# Altium PCB PCB2.PcbDoc
Units mm, origin at the board's own origin, x right, y up, seen from the top; angles counter-clockwise.
Board outline 70 x 70 mm, 2 copper layers (Top Layer, Bottom Layer); 45 components, 52 nets, 141 pads, 143 vias.
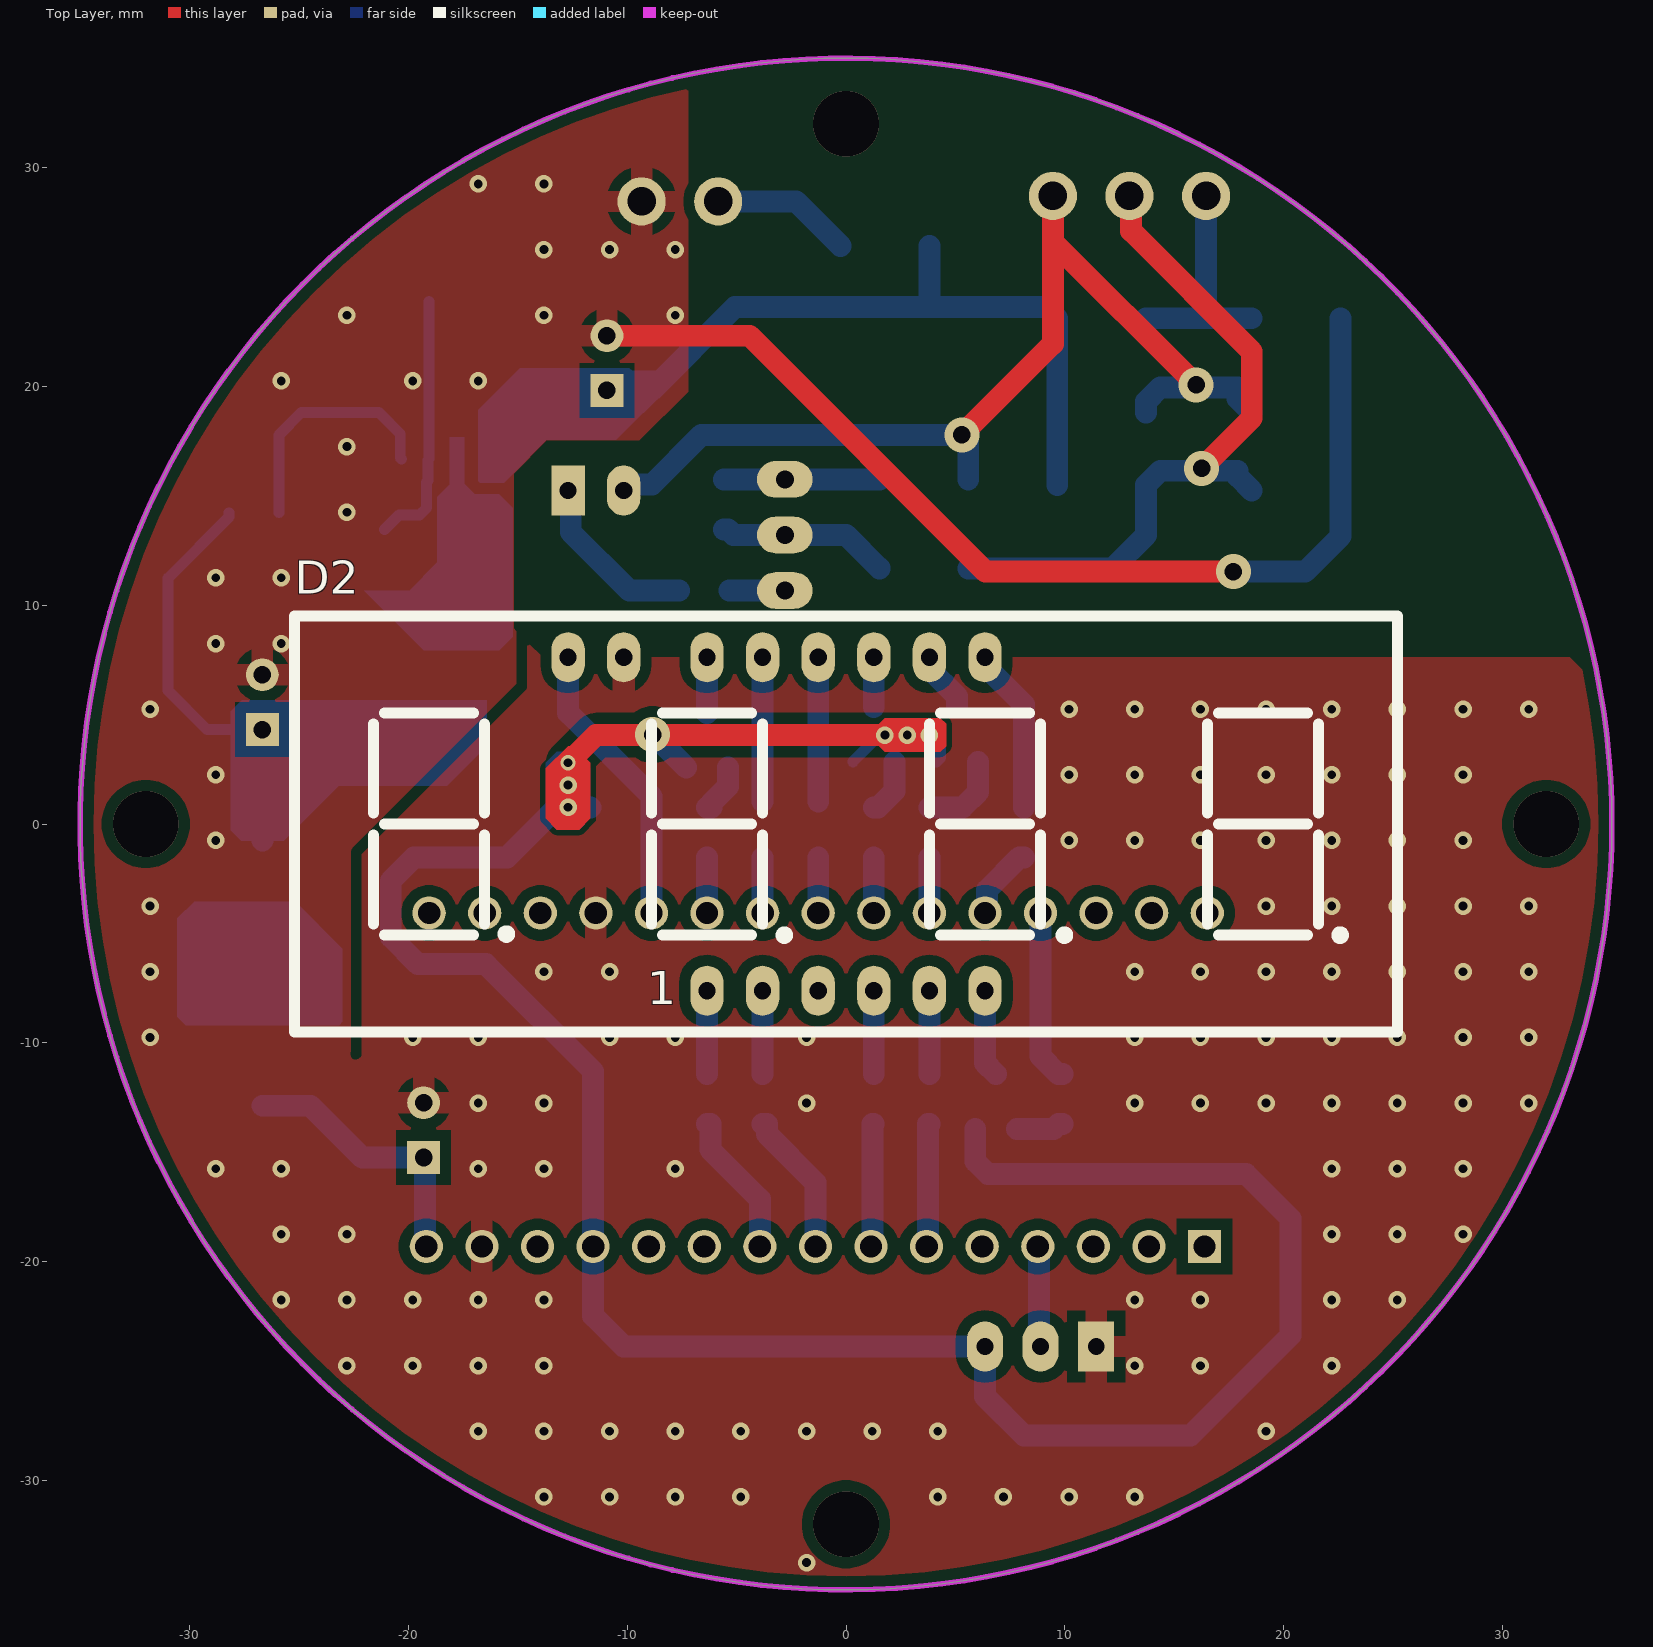
[diagram p0: Top Layer view]
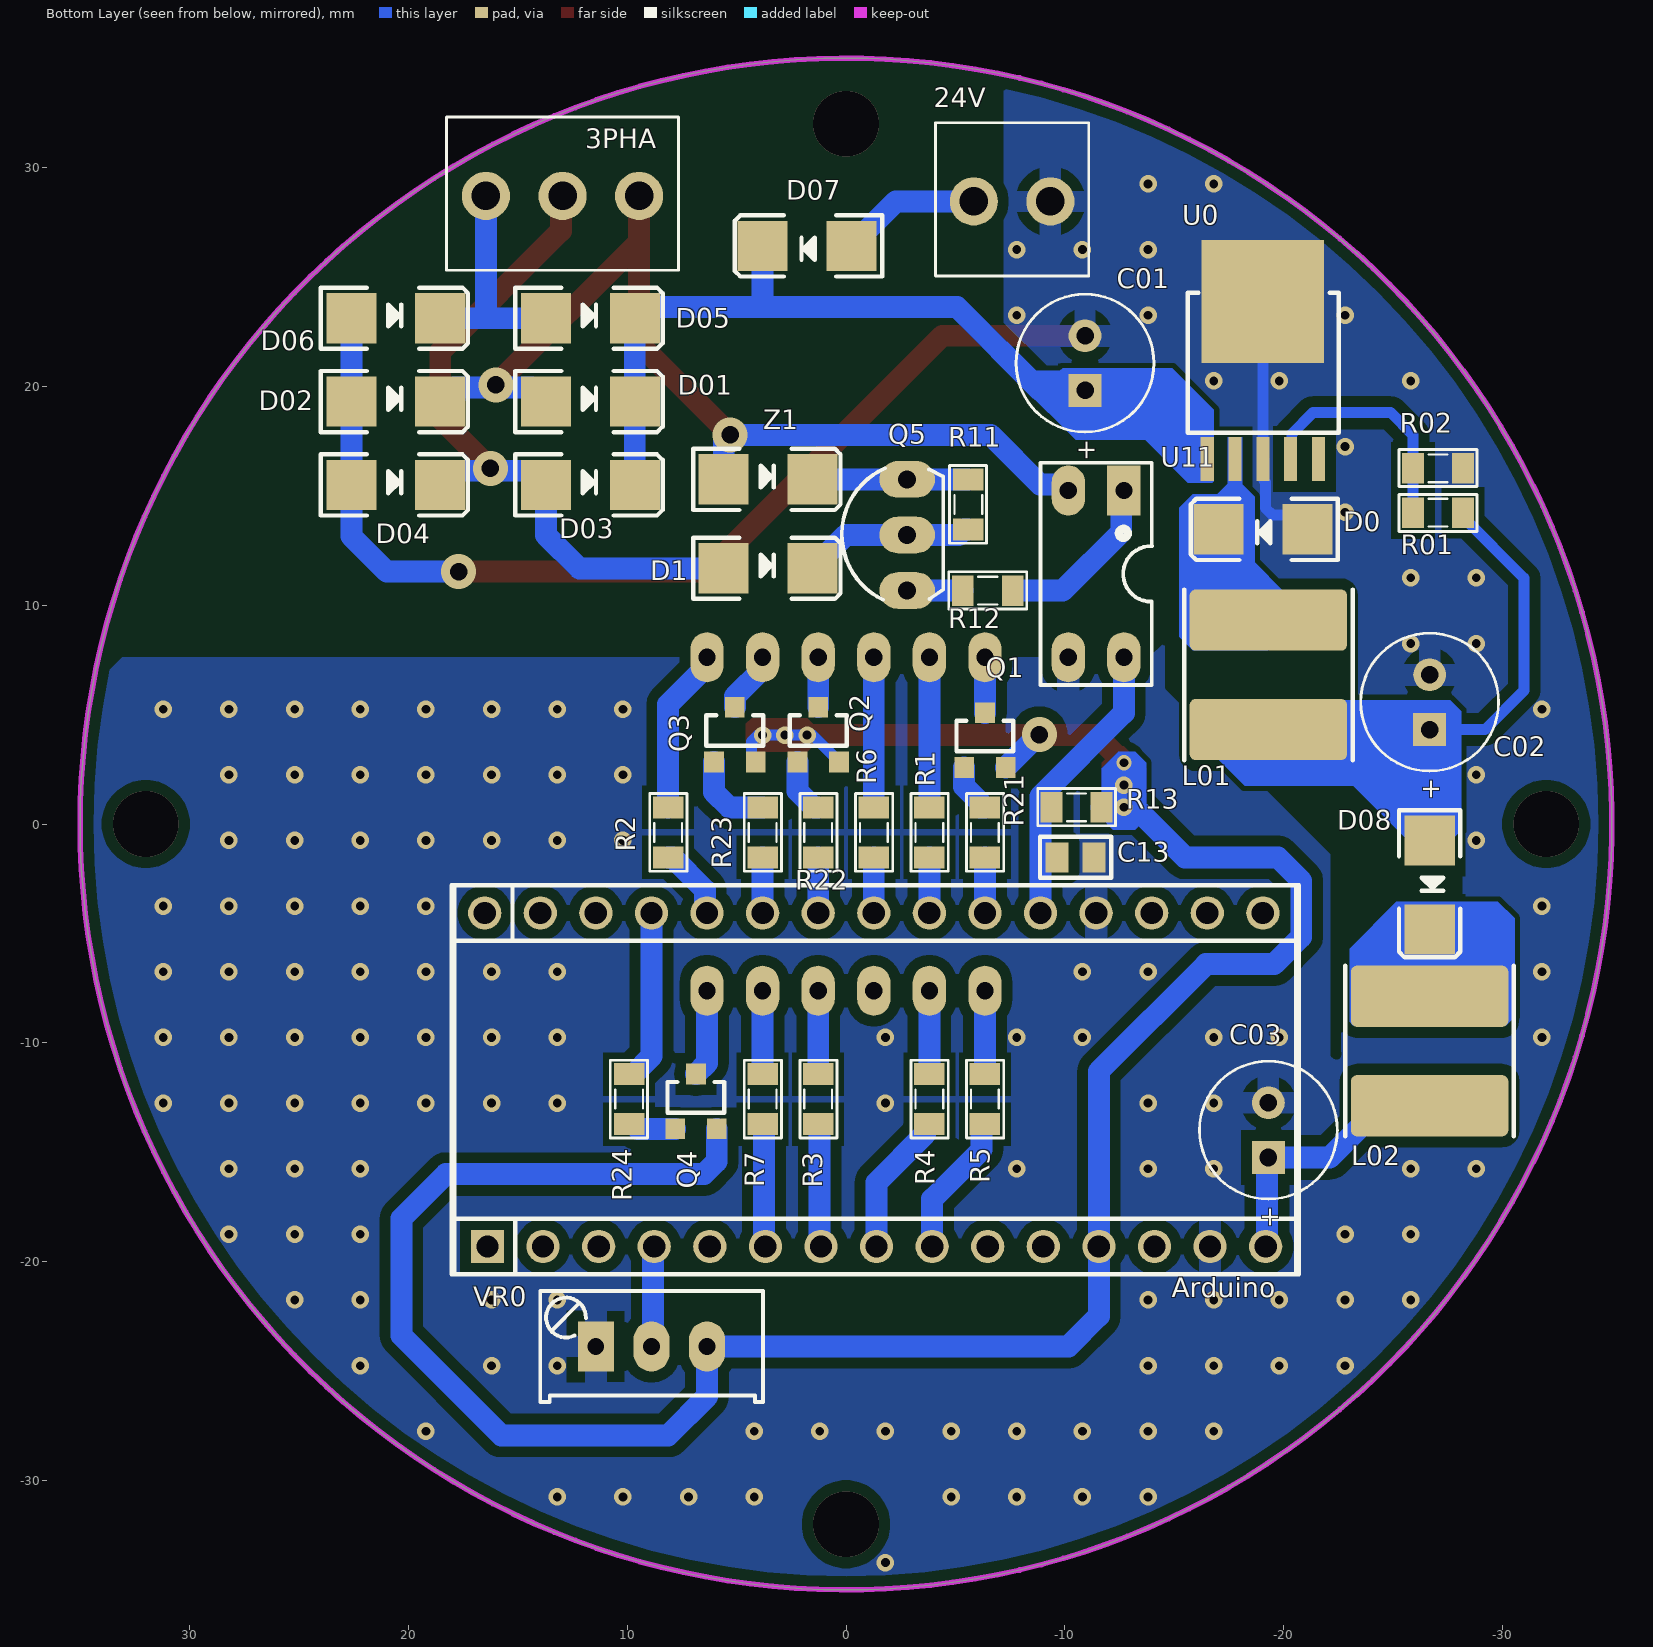
[diagram p1: Bottom Layer view, seen from below]

## Layer stack, top to bottom
Top Solder: solder mask 0.0102, Solder Resist, Dk 3.5
Top Layer: signal copper 0.0356
Dielectric 1: dielectric 0.32, FR-4, Dk 4.8
Bottom Layer: signal copper 0.0356
Bottom Solder: solder mask 0.0102, Solder Resist, Dk 3.5

## Board outline
0,-35 cw(c0,0) -35,0 cw(c0,0) 0,35 cw(c0,0) 35,0 cw(c0,0)

## Design rules (kind name [scope] priority, off if disabled: settings)
Clearance [All] p1: gap=0.254 ignorepadtopadclearanceinfootprint=FALSE except(0: Arc-Hole Track-Hole SMDPad-Hole THPad-Hole Via-Hole Fill-Hole Poly-Hole Region-Hole Text-Hole; 0.5: Arc-Poly Track-Poly SMDPad-Poly THPad-Poly Via-Poly Fill-Poly Poly-Poly)
PolygonConnect [All] p1: thpad.connectstyle=Relief thpad.reliefconductorwidth=1 thpad.reliefentries=4 thpad.polygonreliefangle="90 Angle" thpad.airgapwidth=0.5 smdpad.connectstyle=Direct smdpad.reliefconductorwidth=1 smdpad.reliefentries=4 smdpad.polygonreliefangle="90 Angle" smdpad.airgapwidth=0.5 via.connectstyle=Direct via.reliefconductorwidth=0.254 via.reliefentries=4 via.polygonreliefangle="90 Angle" via.airgapwidth=0.254
RoutingVias [All] p1: holewidth=0.711 width=1.27 viastyle="Through Hole" minholewidth=0.4 minwidth=0.7 maxholewidth=5 maxwidth=5
SolderMaskExpansion [All] p1: expansion=0.102 istentingtop=FALSE
Width [All] p1: maxlimit=1 minlimit=0.254 preferedwidth=0.5
30 further rules are at their usual default settings.

## Components (designator, comment, footprint, x,y, rotation, side; value= is the part's Value field where it differs from the comment)
3PHA "KF3" KF3-3.5 12.954,28.702 r0 bottom
24V "KF2" KF2-3.5 -7.592,28.448 r0 bottom
Arduino "Arduino Nano" "Arduino Nano" -1.524,-12.446 r270 bottom locked value="Cau 1A"
C01 "33/100" CA-ALU-6.3 -10.922,21.062 r90 bottom value=104
C02 "100/35" CA-ALU-6.3 -26.67,5.568 r90 bottom value=104
C03 "100/35" CA-ALU-6.3 -19.304,-13.99 r90 bottom value=104
C13 "0.1uF - 50V" CAPC_0805_N -10.492,-1.524 r0 bottom
D0 "SS54" DIO-SMD-106 -19.05,13.462 r180 bottom value=1N5007
D1 "Diode SMD" DIO-SMD-106 3.556,11.684 r0 bottom value=1N5007
D01 "Diode SMD" DIO-SMD-106 11.684,19.304 r0 bottom value=1N5007
D2 "CA-0.56" LED7SEG-4-0.56 0,0 r0 top locked
D02 "Diode SMD" DIO-SMD-106 20.574,19.304 r0 bottom value=1N5007
D03 "Diode SMD" DIO-SMD-106 11.684,15.494 r0 bottom value=1N5007
D04 "Diode SMD" DIO-SMD-106 20.574,15.494 r0 bottom value=1N5007
D05 "Diode SMD" DIO-SMD-106 11.684,23.114 r0 bottom value=1N5007
D06 "Diode SMD" DIO-SMD-106 20.574,23.114 r0 bottom value=1N5007
D07 "Diode SMD" DIO-SMD-106 1.778,26.416 r180 bottom value=1N5007
D08 "Diode SMD" DIO-SMD-106 -26.67,-2.794 r90 bottom value=1N5007
L01 "100" SMD_IND_7.8x7mm -19.304,6.818 r270 bottom value=39uH
L02 "100" SMD_IND_7.8x7mm -26.67,-10.374 r270 bottom value=39uH
Q1 "40V - 0.2A" SOT-23-132 -6.35,3.83 r180 bottom
Q2 "40V - 0.2A" SOT-23-132 1.27,4.084 r180 bottom
Q3 "40V - 0.2A" SOT-23-132 5.08,4.084 r180 bottom
Q4 "40V - 0.2A" SOT-23-132 6.858,-12.68 r180 bottom
Q5 "2SC1815" TO92-123 -2.794,13.208 r90 bottom value=C1815
R1 "1K" RES-SMD-0805 -3.81,-0.381 r90 bottom
R01 "10K" RES-SMD-0805 -27.051,14.224 r180 bottom
R2 "1K" RES-SMD-0805 8.128,-0.381 r90 bottom
R02 "3K" RES-SMD-0805 -27.051,16.256 r0 bottom
R3 "1K" RES-SMD-0805 1.27,-12.573 r90 bottom
R4 "1K" RES-SMD-0805 -3.81,-12.573 r90 bottom
R5 "1K" RES-SMD-0805 -6.35,-12.573 r90 bottom
R6 "1K" RES-SMD-0805 -1.27,-0.381 r90 bottom
R7 "1K" RES-SMD-0805 3.81,-12.573 r90 bottom
R11 "10K" RES-SMD-0805 -5.588,14.605 r270 bottom
R12 "10K" RES-SMD-0805 -6.477,10.668 r0 bottom
R13 "10K" RES-SMD-0805 -10.541,0.762 r0 bottom
R21 "10K" RES-SMD-0805 -6.35,-0.381 r90 bottom
R22 "10K" RES-SMD-0805 1.27,-0.381 r90 bottom
R23 "10K" RES-SMD-0805 3.81,-0.381 r90 bottom
R24 "10K" RES-SMD-0805 9.906,-12.573 r270 bottom
U0 "XL7015_E1" TO252-5L -16.51,16.676 r180 bottom
U11 "PC817" DIP4 -12.7,15.24 r0 bottom
VR0 "10K" VR-S3 11.43,-23.876 r180 bottom value="Volume 50k"
Z1 "5V" DIO-SMD-106 3.556,15.748 r0 bottom value=1N5007

## Footprints (in the part's own frame and the unit in brackets; to place one, negate y for a bottom-side part, rotate by r counter-clockwise, add the part's x,y. Pads: shape width x height; smd on the part's side, far side on the other; paste and mask are expansions set on the pad)
"Arduino Nano" [mm]
  round 1.52 hole 1.02: 3V3(6.858,-15.367) 5V(6.858,10.033) A0(6.858,-10.287) A1(6.858,-7.747) A2(6.858,-5.207) A3(6.858,-2.667) A4(6.858,-0.127) A5(6.858,2.413) A6(6.858,4.953) A7(6.858,7.493) D2(-8.382,7.366) D3(-8.382,4.826) D4(-8.382,2.286) D5(-8.382,-0.254) D6(-8.382,-2.794) D7(-8.382,-5.334) D8(-8.382,-7.874) D9(-8.382,-10.414) D10(-8.382,-12.954) D11(-8.382,-15.494) D12(-8.382,-18.034) GND(-8.382,9.906) GND(6.858,15.113) REF(6.858,-12.827) RST(-8.382,12.446) RST(6.858,12.573) RX0(-8.382,14.986) TX1(-8.382,17.526) VIN(6.858,17.653)
  rect 1.52x1.52 hole 1.02: D13(6.858,-17.907)
  silkscreen extent -9.65,-19.55 8.13,19.18, body extent -9.65,-23.48 8.14,21.44, height 21.18
CA-ALU-6.3 [mm] "Polarized capacitors, Aluminum Electrolytic Capacitors, 2-Leads, Body 6.3x15x2.5x0.5"
  rect 1.5x1.5 hole 0.8: 1(-1.25,0)
  round 1.5 hole 0.8: 2(1.25,0)
  silkscreen extent -3.15,-3.15 3.15,3.15, body extent -3.13,-3.15 3.17,3.15, height 11
CAPC_0805_N [mm]
  rrect2% 1.05x1.38 smd: 1(-0.84,0) 2(0.84,0)
  silkscreen extent -1.62,-0.94 1.63,0.94, body extent -1,-0.63 1,0.63, height 0.95
DIO-SMD-106 [mil]
  rect 90x90.55 smd: 1(80,0) 2(-80,0)
  silkscreen extent -130,-55 135,55, body extent -99,-50 106,52, height 95
DIP4 [mil]
  rect 60x90 hole 31: 1(0,0)
  oval 60x90 hole 31: 2(100,0) 3(100,300) 4(0,300)
  silkscreen extent -50,-50 150,350, body extent -59,-10 159,305, height 170
KF2-3.5 [mm] "3,50mm - modular - blue - Horizontal wire entry - Pressure clamp - 8,4mm height - 02p"
  round 2.2 hole 1.3: 1(-1.75,0) 2(1.75,0)
  silkscreen extent -3.5,-3.6 3.5,3.4, body extent -3.95,-3.6 4.05,3.4, height 8.41
KF3-3.5 [mm] "3,50mm - modular - blue - Horizontal wire entry - Pressure clamp - 8,4mm height - 03p"
  round 2.2 hole 1.3: 1(-3.5,0) 2(0,0) 3(3.5,0)
  silkscreen extent -5.3,-3.6 5.3,3.4, body extent -5.7,-3.6 5.8,3.4, height 8.41
LED7SEG-4-0.56 [mil]
  oval 60x90 hole 31: 1(-250,-300) 2(-150,-300) 3(-50,-300) 4(50,-300) 5(150,-300) 6(250,-300) 7(250,300) 8(150,300) 9(50,300) 10(-50,300) 11(-150,300) 12(-250,300)
  silkscreen extent -992,-374 992,374, body extent -992,-374 992,374, height 315
RES-SMD-0805 [mil]
  rect 39.37x55 smd: 1(-45,0) 2(45,0)
  silkscreen extent -70,-34 70,33, body extent -39,-25 39,25, height 31
SMD_IND_7.8x7mm [mm]
  rrect20% 2.8x7.2 smd: 1(-2.5,0) 2(2.5,0)
  silkscreen extent -3.9,-3.85 3.9,3.85, body extent -3,-3 3,3, height 2.83
SOT-23-132 [mm]
  rect 0.9x0.95 smd: 1(-0.95,-1.25) 2(0.95,-1.25) 3(0,1.25)
  silkscreen extent -1.3,-0.51 1.3,0.89, body extent -1.5,-1.12 1.5,1.38, height 1.06
TO92-123 [mil] "TO-92"
  oval 66x100 hole 32: 1(-100,0) 2(0,0) 3(100,0)
  silkscreen extent -117,-65 120,118, body extent -109,-66 109,96, height 245
TO252-5L [mm]
  rect 0.6x2 smd: 1(0,0) 2(1.27,0) 3(2.54,0) 4(3.81,0) 5(5.08,0)
  rect 5.6x5.6 smd: 6(2.54,7.2)
  silkscreen extent -0.9,1.2 6,7.6, body extent -0.8,1.7 5.8,8.8, height 2.3
VR-S3 [mil] "Variable Resistor"
  rect 65x90 hole 30: 1(0,0)
  oval 65x90 hole 30: 2(100,0) 3(200,0)
  silkscreen extent -100,-100 301,100, body extent -91,-98 291,90, height 430

## Part data
3PHA: Manufacturer="Würth Elektronik eiSos GmbH", partNo=691103110003, ComponentLink1 Description=Manufacturer, ComponentLink1URL=http://www.we-online.com, ComponentLink2 Description=Datasheet, ComponentLink2URL=http://katalog.we-online.de/em/datasheet/6911031100xx.pdf, Created by="Karrer Zheng", Created Date="29 October 2013", NoPins=3
24V: Manufacturer="Würth Elektronik eiSos GmbH", partNo=691103110002, ComponentLink1 Description=Manufacturer, ComponentLink1URL=http://www.we-online.com, ComponentLink2 Description=Datasheet, ComponentLink2URL=http://katalog.we-online.de/em/datasheet/6911031100xx.pdf, Created by="Karrer Zheng", Created Date="29 October 2013", NoPins=2
Arduino: "Arduino NANO"
C01 C02 C03: library part CN-ALU-DIP, "Capacitor (Semiconductor SIM Model)", LatestRevisionDate=17-Jul-2002, LatestRevisionNote="Re-released for DXP Platform.", PackageReference=C1206, Publisher="Altium Limited"
C13: library part CC0805JRX7R9BB104, "50V 100nF X7R ±5% 0805 Multilayer Ceramic Capacitors MLCC - SMD/SMT ROHS", Category=Capacitor, Creator=Datnd, Detailed Value="0.1uF - 50V", Mounting Type=SMD, PartNumber=CC0805JRX7R9BB104, Supplier=LCSC
D0 Z1: library part "Diode SMD", "Default Diode", Code - JEDEC=DO-214-AB, Published=8-Jun-2000, Publisher="Altium Limited", Revision="July-2002: Re-released for DXP Platform."
D1 D01 D02 D03 D04 D05 D06 D07 D08: "Default Diode", Code - JEDEC=DO-214-AB, Published=8-Jun-2000, Publisher="Altium Limited", Revision="July-2002: Re-released for DXP Platform."
D2: library part MH005139, "LED 7 0.56 4 số Anot (Xanh Dương)", Category=LED, Creator=Tunn, Detailed Value=CA-0.56, Link sale=#https://banlinhkien.vn/goods-5139-led-7-0-56-4-so-anot-xanh-duong-.html#, Mounting Type=TH, PartNumber=MH005139, Supplier="MINH HÀ"
L01 L02: library part CMLF0705-390KTT, "1.4A 39uH Unshielded inductor ±10% SMD,7.8x7mm Power Inductors ROHS", Detailed Value=39uH, Manufacture=Cybermax, Category=Inductor, Creator=Datnd, Mounting Type=SMD, PartNumber=CMLF0705-390KTT, Supplier=LCSC
Q1 Q2 Q3 Q4: library part MMBT3906, "Bipolar (BJT) Transistor PNP 40V 200mA 250MHz 300mW Surface Mount SOT-23-3", Detailed Value="PNP 40V 200mA", Manufacture="Diodes Incorporated", Category=Transistor, Creator=Tunn, Datasheet=#https://media.digikey.com/pdf/Data%20Sheets/Diodes%20PDFs/MMBT3906.pdf#, Link sale=#https://www.digikey.com/products/en?keywords=MMBT3906#, Mounting Type=SMD, PartNumber=MMBT3906, Supplier=Digikey
Q5: "NPN 600mW, ECB"
R1 R01 R2 R02 R3 R4 R5 R6 R7 R11 R12 R13 R21 R22 R23 R24: library part Res-SMD, "Resistor", Manufacturer="Generic Components", Class=Passive, Published=08/06/2000, Publisher="Altium Hobart Technology Centre"
U11: "Single Opto"
VR0: library part VR-S, "Var Resistor"

## Via types
v1: diameter 0.8, hole 0.4, Top Layer to Bottom Layer, tented both sides, 133 vias
v2: diameter 1.6, hole 0.8, Top Layer to Bottom Layer, tented both sides, 5 vias
v3: diameter 3, hole 3, Top Layer to Bottom Layer, 4 vias
v4: diameter 0.7, hole 0.4, Top Layer to Bottom Layer, tented both sides, 1 vias

## Nets (pads, with @x,y where several pads share a name; then routed paths per layer and width w, separated by ;. In a path a pad name is that pad's centre, name@x,y a point inside that pad or via, vN(x,y) a via of type N, cw(c..) or ccw(c..) an arc to the next point about the centre after c; other vN are vias at no path point)
3: Arduino.D3 R21.1 | length 2.5
  Bottom Layer w1: Arduino.D3 R21.1
3V3: Arduino.3V3
4: Arduino.D4 R1.1 | length 2.5
  Bottom Layer w1: Arduino.D4 R1.1
5: Arduino.D5 R6.1 | length 2.5
  Bottom Layer w1: Arduino.D5 R6.1
5V4: C02.1 D08.1 L01.2 R01.2 | length 27.3
  Bottom Layer w0.5: R01.2 -28.194,14.026 -30.988,11.232 -30.988,6.096 -29.21,4.318 -26.924,4.318 -26.67,4.572 C02.1@-26.416,4.318 ; C02.1 C02.1@-26.416,4.318 ; L01.2 C02.1@-26.416,4.318
  Bottom Layer w1: D08.1 C02.1
6: Arduino.D6 R22.1 | length 2.5
  Bottom Layer w1: Arduino.D6 R22.1
7: Arduino.D7 R23.1 | length 2.5
  Bottom Layer w1: Arduino.D7 R23.1
8: Arduino.D8 R2.1 | length 3.4
  Bottom Layer w1: Arduino.D8 6.449,-3.965 6.449,-3.004 7.93,-1.524 R2.1
9: Arduino.D9 R24.1 | length 7.9
  Bottom Layer w1: Arduino.D9 8.89,-10.612 9.708,-11.43 R24.1
10: Arduino.D10
11: Arduino.D11
12: Arduino.D12
13: Arduino.D13
24V: C01.1 D01.2 D03.2 D05.2 D07.2 U0.1 | length 32.8
  Bottom Layer w1: C01.1 -8.89,19.812 -5.08,23.622 3.81,23.622 ; D07.2 3.81,23.622 ; D03.2 D01.2 D05.2 9.144,23.622 3.81,23.622
A: 3PHA.2 D1.1 D03.1 D04.2 | length 32.5
  Top Layer w1: 3PHA.2 13.03,28.626 13.03,27.102 18.542,21.59 18.542,18.542 v2(16.256,16.256)
  Bottom Layer w1: D1.1 12.192,11.684 13.716,13.208 D03.1 13.716,15.498 14.359,16.141 16.141,16.141 v2(16.256,16.256) 16.371,16.141 17.899,16.141 17.899,15.883 D04.2@18.542,15.24
A0: Arduino.A0 VR0.2 | length 4.6
  Bottom Layer w1: Arduino.A0 8.826,-19.367 8.826,-23.812 VR0.2
A1: Arduino.A1
A2: Arduino.A2 R7.1 | length 5.7
  Bottom Layer w1: Arduino.A2 3.746,-19.241 3.746,-13.716 R7.1
A3: Arduino.A3 R3.1 | length 5.7
  Bottom Layer w1: Arduino.A3 1.206,-19.241 1.206,-13.716 R3.1
A4: Arduino.A4 R4.1 | length 6.7
  Bottom Layer w1: R4.1 -3.612,-13.716 -3.612,-14.168 -1.397,-16.383 Arduino.A4
A5: Arduino.A5 R5.1 | length 6.7
  Bottom Layer w1: R5.1 -6.198,-13.716 -6.198,-14.884 -3.937,-17.145 Arduino.A5
A6: Arduino.A6
A7: Arduino.A7
B: 3PHA.1 D01.1 D02.2 U11.2 Z1.1 | length 47.1
  Top Layer w1: v2(5.295,17.78) 9.454,21.939 9.454,26.614 ; 3PHA.1 9.454,26.614 ; v2(16.002,20.066) 9.454,26.614
  Bottom Layer w1: U11.2 -10.16,15.28 -9.918,15.522 -8.862,15.522 -6.604,17.78 v2(5.295,17.78) 5.588,17.487 Z1.1 ; D01.1@13.716,18.796 13.716,19.308 14.359,19.951 15.887,19.951 v2(16.002,20.066) 16.117,19.951 17.899,19.951 17.899,19.439 D02.2@18.542,18.796
C: 3PHA.3 D05.1 D06.2 | length 10.4
  Bottom Layer w1: D05.1 16.51,23.114 ; 3PHA.3 16.454,23.17 16.51,23.114 ; D06.2 16.51,23.114
GND: 24V.1 Arduino.GND C01.2 C02.2 C03.2 C13.1 D0.1 D02.1 D04.1 D06.1 R02.1 U0.3 U0.6 U11.3 VR0.1 | length 60.4
  Top Layer w1: C01.2 -4.405,22.312 6.375,11.532 v2(17.704,11.532)
  Bottom Layer w0.5: D0.1 -20.422,14.122 -19.482,14.122 -19.173,14.431 -19.173,15.633 -19.1,15.706 -19.1,16.626 U0.3 U0.6
  Bottom Layer w1: v2(17.704,11.532) 20.98,11.532 22.606,13.157 D04.1 D02.1 D06.1
  other v1: -1.804,-33.752 -13.804,-30.752 -10.804,-30.752 -7.804,-30.752 -4.804,-30.752 4.196,-30.752 7.196,-30.752 10.196,-30.752 13.196,-30.752 -16.804,-27.752 -13.804,-27.752 -10.804,-27.752 -7.804,-27.752 -4.804,-27.752 -1.804,-27.752 1.196,-27.752 4.196,-27.752 19.196,-27.752 -22.804,-24.752 -19.804,-24.752 -16.804,-24.752 -13.804,-24.752 13.196,-24.752 16.196,-24.752 22.196,-24.752 -25.804,-21.752 -22.804,-21.752 -19.804,-21.752 -16.804,-21.752 -13.804,-21.752 13.196,-21.752 16.196,-21.752 22.196,-21.752 25.196,-21.752 -25.804,-18.752 -22.804,-18.752 22.196,-18.752 25.196,-18.752 28.196,-18.752 -28.804,-15.752 -25.804,-15.752 -16.804,-15.752 -13.804,-15.752 -7.804,-15.752 22.196,-15.752 25.196,-15.752 28.196,-15.752 -16.804,-12.752 -13.804,-12.752 -1.804,-12.752 13.196,-12.752 16.196,-12.752 19.196,-12.752 22.196,-12.752 25.196,-12.752 28.196,-12.752 31.196,-12.752 -31.804,-9.752 -19.804,-9.752 -16.804,-9.752 -10.804,-9.752 -7.804,-9.752 -1.804,-9.752 13.196,-9.752 16.196,-9.752 19.196,-9.752 22.196,-9.752 25.196,-9.752 28.196,-9.752 31.196,-9.752 -31.804,-6.752 -13.804,-6.752 -10.804,-6.752 13.196,-6.752 16.196,-6.752 19.196,-6.752 22.196,-6.752 25.196,-6.752 28.196,-6.752 31.196,-6.752 -31.804,-3.752 19.196,-3.752 22.196,-3.752 25.196,-3.752 28.196,-3.752 31.196,-3.752 -28.804,-0.752 10.196,-0.752 13.196,-0.752 16.196,-0.752 19.196,-0.752 22.196,-0.752 25.196,-0.752 28.196,-0.752 -28.804,2.248 10.196,2.248 13.196,2.248 16.196,2.248 19.196,2.248 22.196,2.248 25.196,2.248 28.196,2.248 -31.804,5.248 10.196,5.248 13.196,5.248 16.196,5.248 19.196,5.248 22.196,5.248 25.196,5.248 28.196,5.248 31.196,5.248 -28.804,8.248 -25.804,8.248 -28.804,11.248 -25.804,11.248 -22.804,14.248 -22.804,17.248 -25.804,20.248 -19.804,20.248 -16.804,20.248 -22.804,23.248 -13.804,23.248 -7.804,23.248 -13.804,26.248 -10.804,26.248 -7.804,26.248 -16.804,29.248 -13.804,29.248
Net24V_2: 24V.2 D07.1 | length 6.4
  Bottom Layer w1: 24V.2 -2.279,28.448 -0.254,26.423 D07.1
NetD0_2: D0.2 L01.1 U0.2 | length 8.2
  Bottom Layer w0.5: L01.1 -18.928,9.318 -17.78,10.466 U0.2
NetD1_2: D1.2 Q5.2 R11.2 | length 7.9
  Bottom Layer w1: R11.2 -5.39,13.462 -5.136,13.208 Q5.2 0.007,13.208 1.524,11.691 D1.2
NetD2_1: D2.1 R5.2 | length 3.8
  Bottom Layer w1: R5.2 D2.1
NetD2_2: D2.2 R4.2 | length 3.8
  Bottom Layer w1: R4.2 D2.2
NetD2_4: D2.4 R3.2 | length 3.8
  Bottom Layer w1: R3.2 D2.4
NetD2_5: D2.5 R7.2 | length 3.8
  Bottom Layer w1: R7.2 D2.5
NetD2_6: D2.6 Q4.3 | length 4
  Bottom Layer w1: D2.6 6.35,-10.922 Q4.3
NetD2_7: D2.7 R2.2 | length 7.6
  Bottom Layer w1: D2.7 6.35,7.239 8.128,5.461 R2.2
NetD2_8: D2.8 Q3.3 | length 2.8
  Bottom Layer w1: D2.8 3.81,7.097 5.08,5.827 Q3.3
NetD2_9: D2.9 Q2.3 | length 2.3
  Bottom Layer w1: Q2.3 D2.9
NetD2_10: D2.10 R6.2 | length 6.6
  Bottom Layer w1: R6.2@-1.27,1.016 D2.10
NetD2_11: D2.11 R1.2 | length 6.6
  Bottom Layer w1: R1.2@-3.81,1.016 D2.11
NetD2_12: D2.12 Q1.3 | length 2.5
  Bottom Layer w1: Q1.3 D2.12
NetD08_2: D08.2 L02.1 | length 3
  Bottom Layer w1: L02.1 D08.2
NetQ1_1: Q1.1 R21.2 | length 2.3
  Bottom Layer w1: R21.2 -6.152,0.762 -6.152,0.96 -5.4,1.712 Q1.1
NetQ2_1: Q2.1 R22.2 | length 2.6
  Bottom Layer w1: R22.2 1.468,0.762 2.22,1.514 Q2.1
NetQ3_1: Q3.1 R23.2 | length 3.9
  Bottom Layer w1: R23.2 5.334,0.762 6.03,1.458 Q3.1
NetQ4_1: Q4.1 R24.2 | length 2.2
  Bottom Layer w1: Q4.1 9.494,-13.93 9.708,-13.716 R24.2
NetQ5_1: Q5.1 R12.2 | length 2.5
  Bottom Layer w1: R12.2 Q5.1
NetQ5_3: Q5.3 R11.1 Z1.2 | length 7.1
  Bottom Layer w1: R11.1 Q5.3 Z1.2
NetR01_1: R01.1 R02.2 U0.4 | length 11.1
  Bottom Layer w0.5: R01.1 R02.2 -25.908,17.78 -24.892,18.796 -21.336,18.796 -20.37,17.83 -20.37,16.726 U0.4
NetR12_1: R12.1 U11.1 | length 8
  Bottom Layer w1: U11.1 -12.576,15.116 -12.576,13.338 -9.906,10.668 R12.1
SIG: Arduino.D2 C13.2 R13.2 U11.4 | length 13.3
  Bottom Layer w1: U11.4 -12.7,5.08 -8.89,1.27 Arduino.D2
VCC: Arduino.5V Q1.2 Q2.2 Q3.2 Q4.2 R13.1 VR0.3 | length 120.6
  Top Layer w1: v4(-12.7,2.794) -11.43,4.064 v1(1.778,4.064)
  Bottom Layer w0.5: Q2.2 0.32,2.859 1.525,4.064 v1(1.778,4.064) v1(3.81,4.064) 4.025,4.064 4.318,3.771 4.318,3.022 Q3.2
  Bottom Layer w1: v4(-12.7,2.794) v1(-12.7,0.762) ; R13.1 v1(-12.7,0.762) ; v2(-8.839,4.089) -8.809,4.089 Q1.2 ; Q4.2 5.908,-15.416 6.494,-16.002 18.288,-16.002 20.32,-18.034 20.32,-23.368 15.748,-27.94 8.128,-27.94 6.35,-26.162 VR0.3 -10.16,-23.876 -11.557,-22.479 Arduino.5V -11.557,-11.303 -16.459,-6.401 -19.558,-6.401 -20.803,-5.156 -20.803,-2.591 -19.736,-1.524 -15.494,-1.524 -13.208,0.762 v1(-12.7,0.762)
  other v1: -12.7,1.778 2.794,4.064
VIN: Arduino.VIN C03.1 L02.2 | length 12.5
  Bottom Layer w1: L02.2 -24.47,-12.874 -22.104,-15.24 C03.1 -19.241,-15.303 -19.241,-19.241 Arduino.VIN
pads on no net: Arduino.REF Arduino.RST Arduino.RX0 Arduino.TX1 D2.3 U0.5
copper on no net:
  other v3: 0,-32 -32,0 32,0 0,32

## Polygon pours and split planes (outlines as drawn)
GND on Bottom Layer "GND_L02_P001" (solid, remove dead copper, pour order 1): -7.214,34.112 -7.214,19.761 -9.449,17.526 -13.665,17.526 -15.189,16.002 -15.189,8.941 -13.868,7.62 33.071,7.62 37.109,3.581 37.109,-17.018 17.526,-36.601 -20.93,-36.601 -39.319,-18.212 -39.319,16.967 -19.279,37.008
GND on Top Layer "GND_L01_P000" (solid, remove dead copper, pour order 0): -7.214,34.112 -7.214,19.761 -9.449,17.526 -13.665,17.526 -15.189,16.002 -15.189,8.941 -13.868,7.62 33.071,7.62 37.109,3.581 37.109,-17.018 17.526,-36.601 -20.93,-36.601 -39.319,-18.212 -39.319,16.967 -19.279,37.008

## Keep-outs
Keep-Out Layer:
  circle w0.254: c0,0 r35

## Other copper
Top Layer:
  region net VCC: 1.016,4.064 1.778,4.826 4.318,4.826 4.572,4.572 4.572,3.556 4.318,3.302 1.778,3.302 1.27,3.81
  region net VCC: -12.446,3.556 -12.7,3.556 -13.716,2.54 -13.716,0.254 -13.208,-0.254 -12.192,-0.254 -11.684,0.254 -11.684,2.794 -12.192,3.302
Bottom Layer:
  pour cut-out: -28.19,-1.615 -28.19,-3.878 -27.97,-4.098 -27.284,-4.098 -27.03,-3.844 -27.03,-1.939 -27.208,-1.761
  pour cut-out: -23.411,8.198 -23.411,5.935 -23.19,5.715 -22.504,5.715 -22.25,5.969 -22.25,7.874 -22.428,8.052
  region net NetD08_2: -29.794,-3.556 -30.556,-4.318 -30.556,-8.814 -30.175,-9.195 -23.165,-9.195 -23.012,-9.042 -23.012,-5.69 -25.146,-3.556
  region net 5V4: -16.408,5.664 -27.61,5.664 -28.118,5.156 -28.118,-0.279 -27.635,-0.762 -25.705,-0.762 -23.19,1.753 -18.212,1.753 -16.408,3.556
  region net NetD0_2: -18.11,17.678 -18.11,15.519 -18.669,14.961 -18.669,11.963 -19.964,10.668 -22.022,10.668 -19.304,7.95 -15.85,7.95 -15.24,8.56 -15.24,14.453 -15.85,15.062 -16.967,15.062 -17.45,15.545 -17.45,17.678
  region net 24V: -16.815,18.923 -14.91,20.828 -9.906,20.828 -9.779,20.701 -8.077,20.701 -8.026,20.65 -8.026,20.015 -10.49,17.551 -13.665,17.551 -15.621,15.596 -16.739,15.596 -16.815,15.672
  region net VCC: -13.208,3.302 -13.716,2.794 -13.716,0.254 -13.208,-0.254 -12.192,-0.254 -11.684,0.254 -11.684,2.54 -12.446,3.302
Multi-Layer:
  pour cut-out: -22.226,-10.693 cw(c-22.403,-10.516) -22.628,-10.406 -22.628,-1.27 cw(c-22.377,-1.27) -22.554,-1.093 -22.555,-1.093 -15.059,6.403 -15.059,10.922 cw(c-14.808,10.922) -14.558,10.922 -14.558,6.299 cw(c-14.808,6.299) -14.631,6.122 -22.127,-1.374 -22.127,-10.49 cw(c-22.377,-10.49)

## Silkscreen, mask and mechanical layers (free items; w line width, h text height)
Mechanical 7:
  lines w0.5: -22.403,-10.516 -22.377,-10.49 -22.377,-1.27 -14.808,6.299 -14.808,10.922
Mechanical 13:
  lines w0.2: -24.892,-25.108 25.108,-25.108 25.108,24.892 -24.892,24.892 -24.892,-25.108

## Text inside footprints (layer, text, board x,y; h text height)
C01: Bottom Overlay "+" at -11.659,16.587 h1.5 r270
C02: Bottom Overlay "+" at -27.407,1.093 h1.5 r270
C03: Bottom Overlay "+" at -20.041,-18.465 h1.5 r270
D2: Top Overlay "1" at -9.093,-8.23 h1.52